# Altium PCB SmartKey_v3.PcbDoc
Units mm, origin at the board's own origin, x right, y up, seen from the top; angles counter-clockwise.
Board outline 79 x 72 mm, 2 copper layers (Top Layer, Bottom Layer); 36 components, 19 nets, 113 pads, 246 vias.
Unrouted connection lines stored in the file: 24.
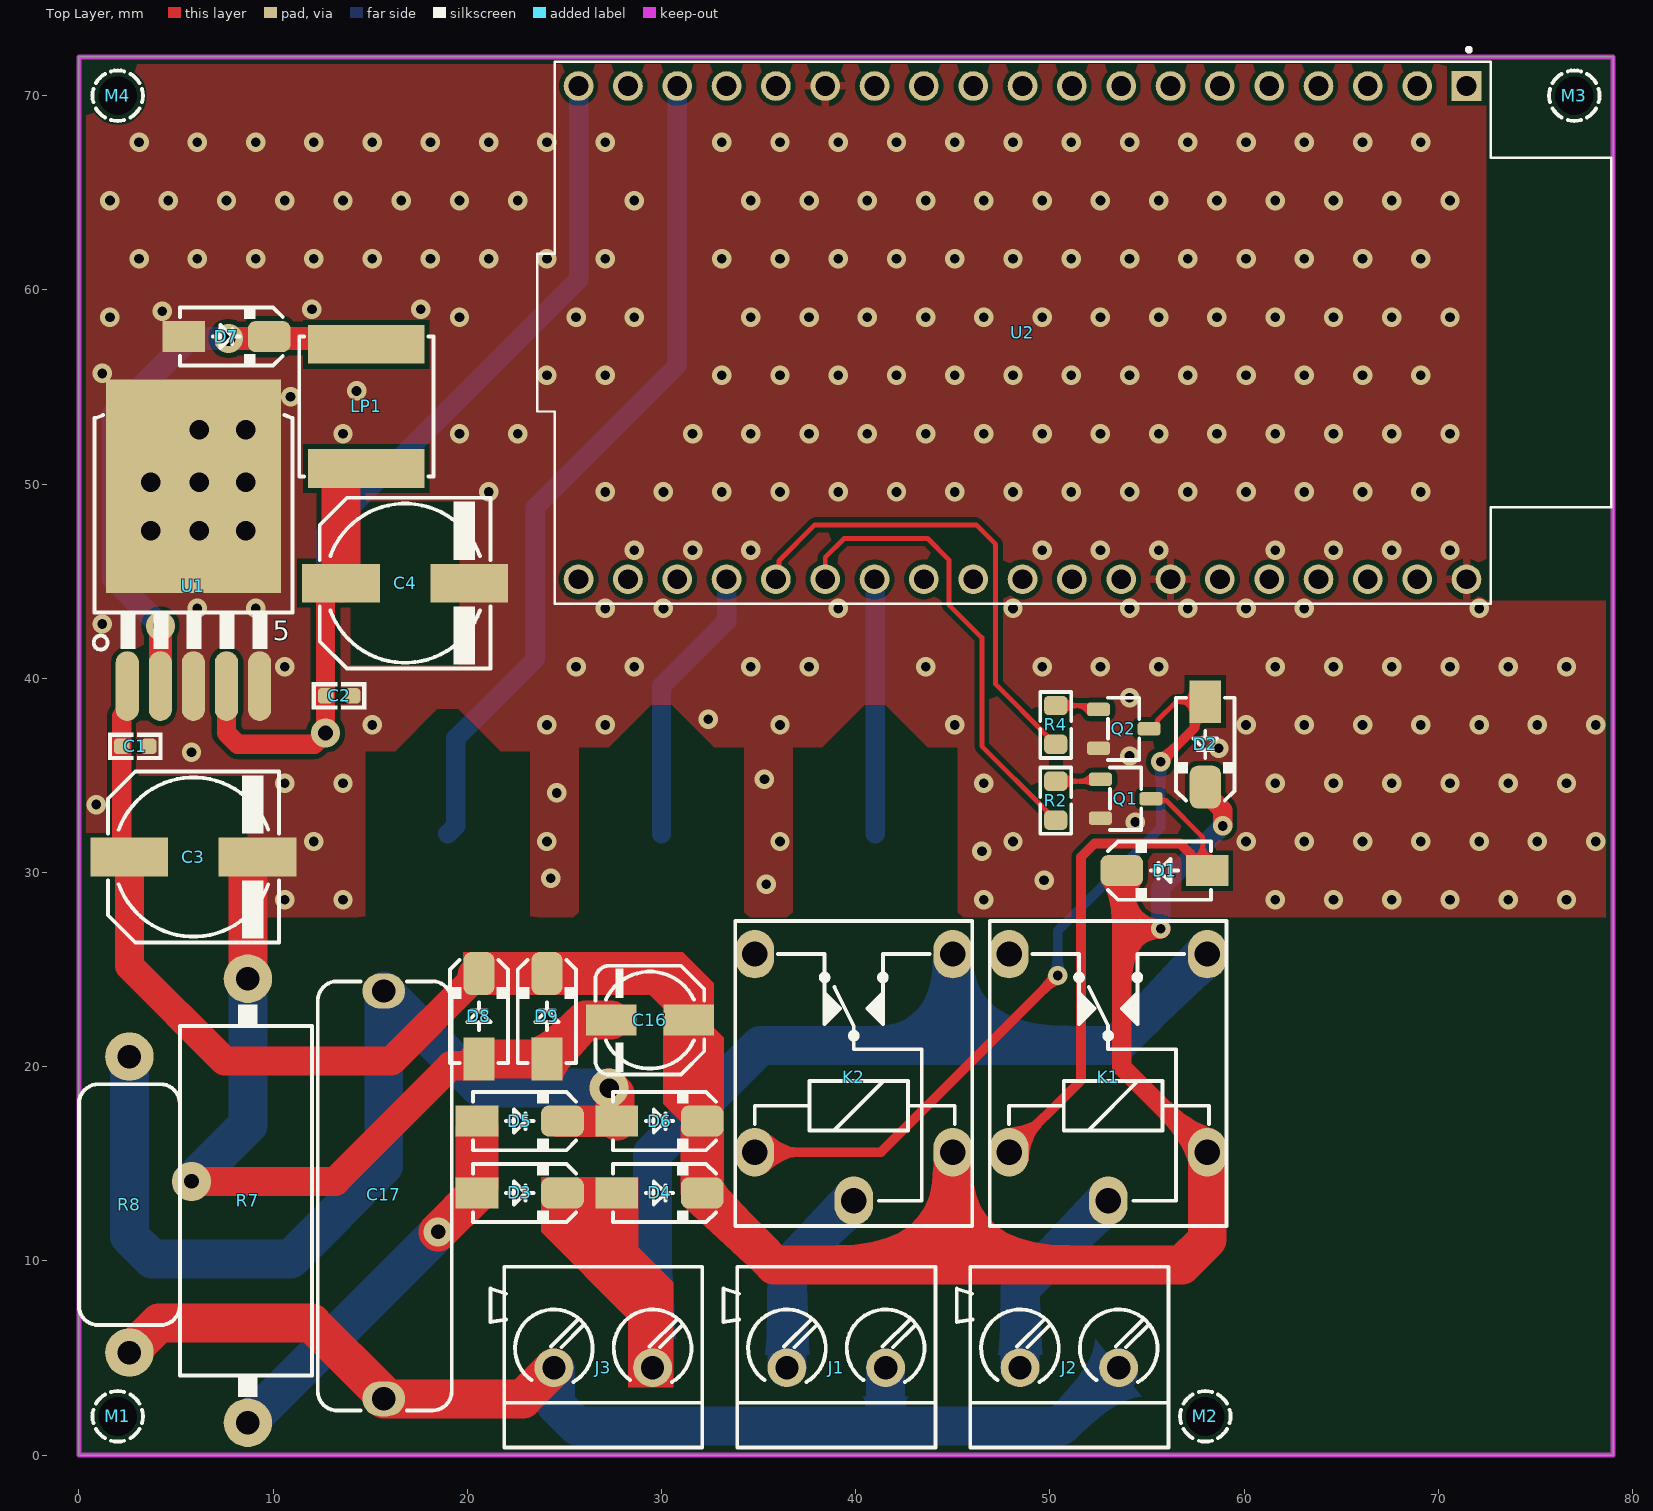
[diagram p0: Top Layer view]
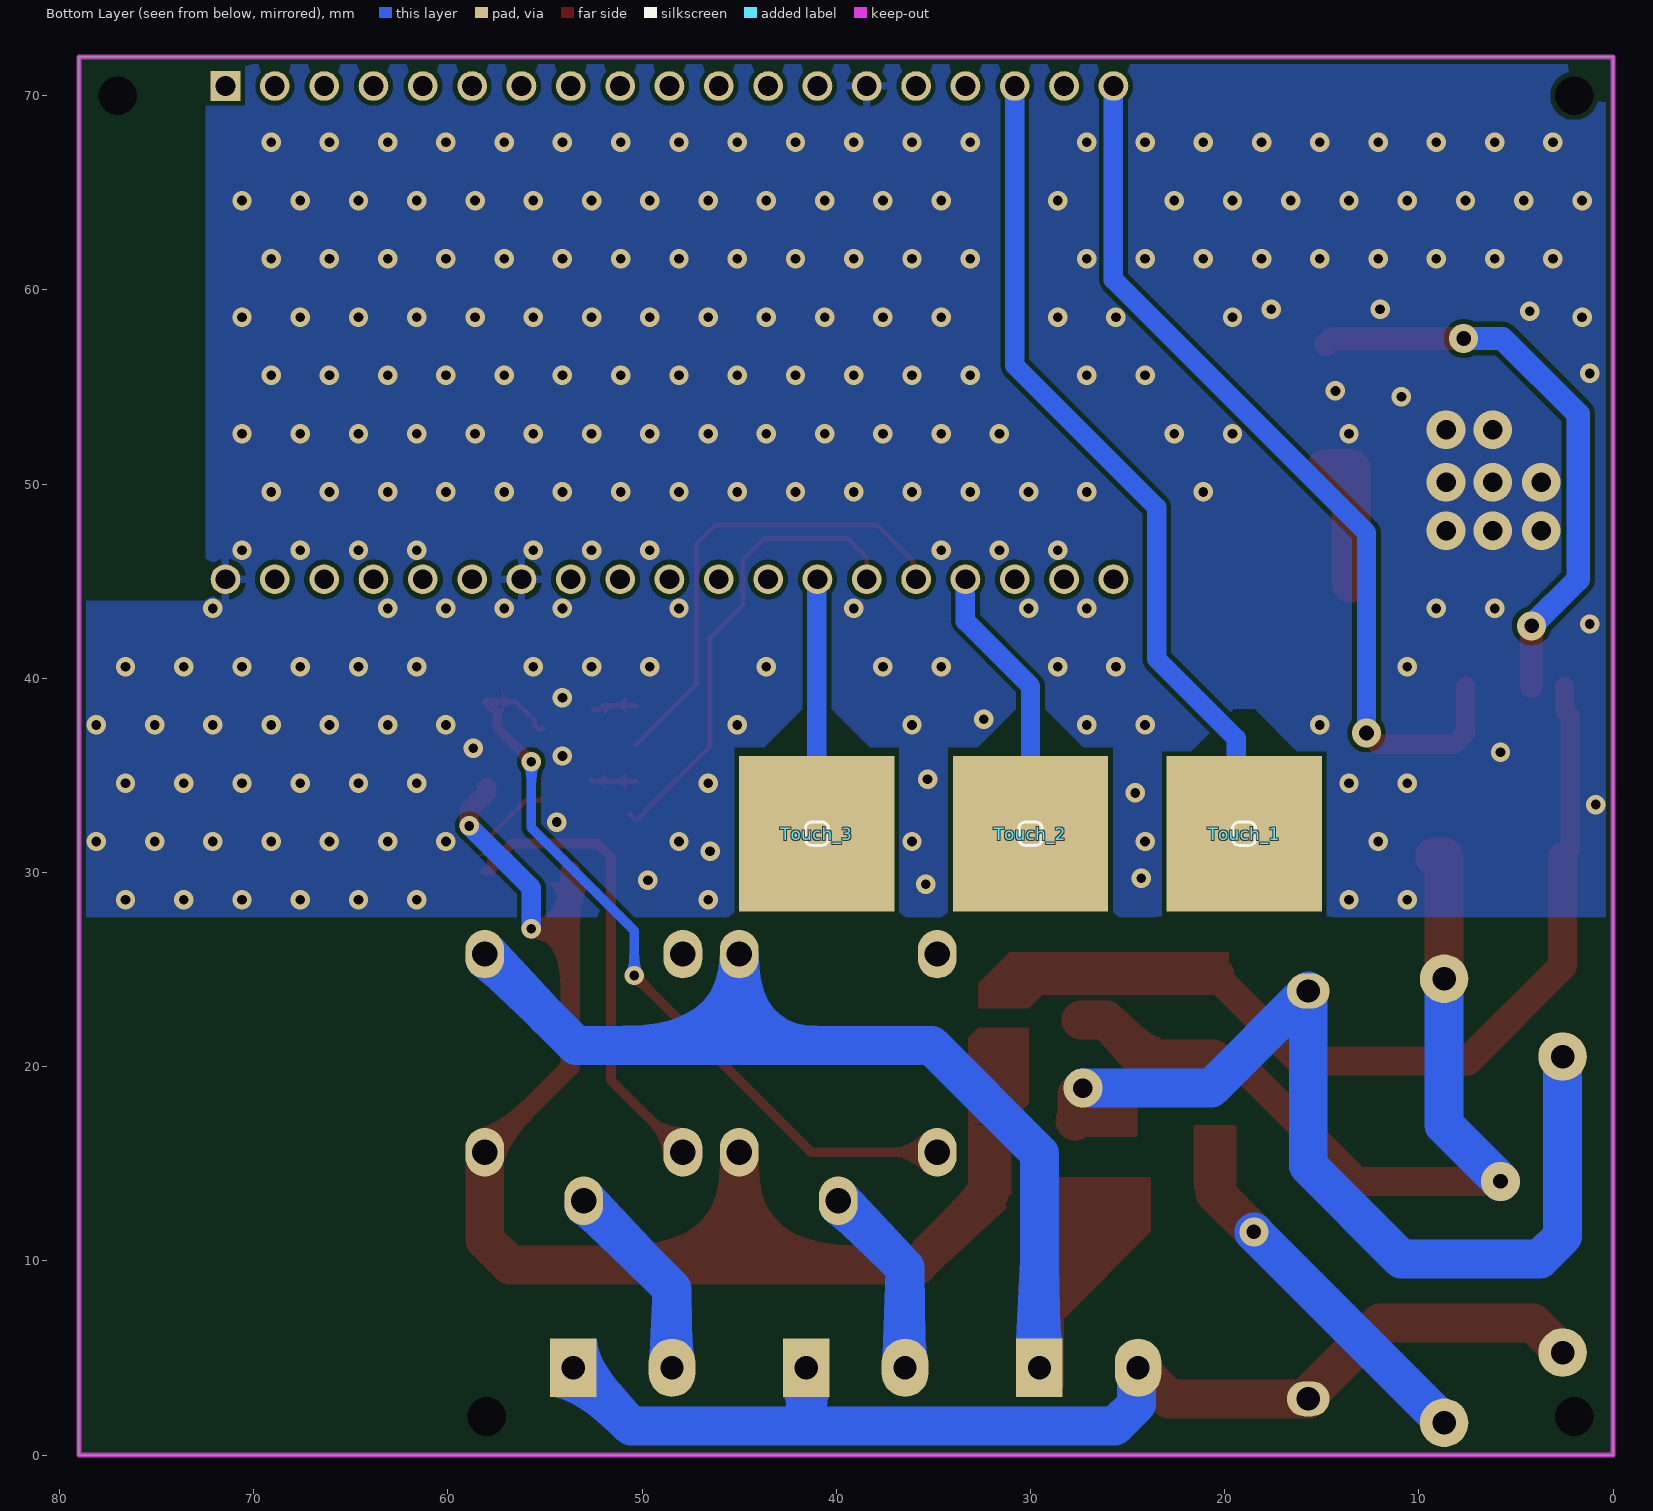
[diagram p1: Bottom Layer view, seen from below]
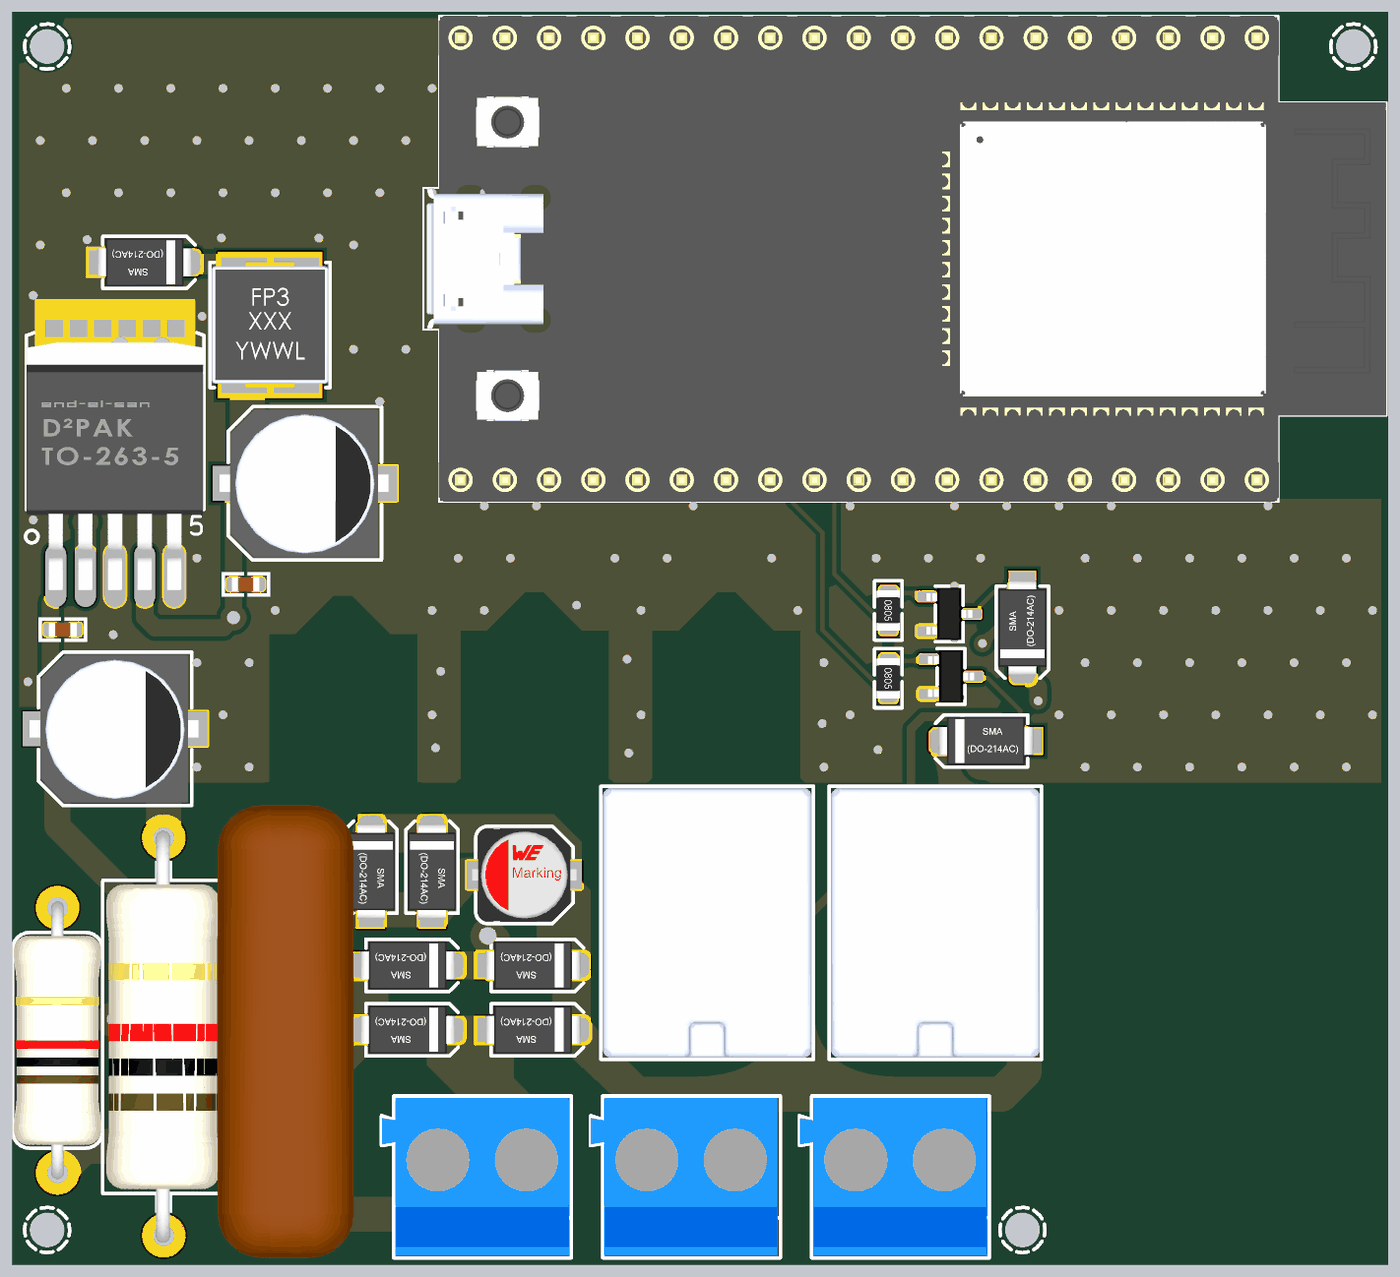
[diagram p2: 3D render of the assembled board from above, using the file's embedded part models]

## Layer stack, top to bottom
Top Solder: solder mask 0.0102, Solder Resist, Dk 3.5
Top Layer: signal copper 0.0356
Dielectric 1: dielectric 0.32, FR-4, Dk 4.8
Bottom Layer: signal copper 0.0356
Bottom Solder: solder mask 0.0102, Solder Resist, Dk 3.5

## Board outline
0,0 79,0 79,72 0,72

## Design rules (kind name [scope] priority, off if disabled: settings)
Clearance [All] p1: gap=0.25 ignorepadtopadclearanceinfootprint=FALSE
DiffPairsRouting [All] p1: maxlimit=0.3 minlimit=0.2 mostfreqgap=0.3 toplayer_minwidth=0.2 toplayer_maxwidth=0.3 toplayer_prefwidth=0.3 bottomlayer_minwidth=0.2 bottomlayer_maxwidth=0.3 bottomlayer_prefwidth=0.3 maxuncoupledlength=12.7
HoleSize [All] p1: absolutevalues=TRUE maxlimit=10 minlimit=0.5 maxpercent=80.000 minpercent=20.000
HoleToHoleClearance [All] p1: gap=0.3 allowstackedmicrovias=TRUE
PlaneClearance [All] p1: clearance=0.3
PlaneConnect [All] p1: pad.planeconnectstyle=Relief pad.reliefexpansion=0.5 pad.reliefentries=4 pad.reliefconductorwidth=0.4 pad.reliefairgap=0.3 via.planeconnectstyle=Direct via.reliefexpansion=0.5 via.reliefentries=4 via.reliefconductorwidth=0.4 via.reliefairgap=0.3
PolygonConnect PolygonConnect_Via [All vs IsVia] p1: connectstyle=Direct reliefconductorwidth=0.254 reliefentries=4 polygonreliefangle="90 Angle" airgapwidth=0.254
PolygonConnect PolygonConnect_Pad [All] p2: thpad.connectstyle=Relief thpad.reliefconductorwidth=0.4 thpad.reliefentries=4 thpad.polygonreliefangle="90 Angle" thpad.airgapwidth=0.3 smdpad.connectstyle=Direct smdpad.reliefconductorwidth=0.4 smdpad.reliefentries=4 smdpad.polygonreliefangle="90 Angle" smdpad.airgapwidth=0.3 via.connectstyle=Relief via.reliefconductorwidth=0.4 via.reliefentries=4 via.polygonreliefangle="90 Angle" via.airgapwidth=0.3
RoutingVias [All] p1: holewidth=0.5 width=1 viastyle="Through Hole" minholewidth=0.5 minwidth=1 maxholewidth=5 maxwidth=10
SolderMaskExpansion [All] p1: expansion=0.102 istentingtop=FALSE
Width [All] p1: maxlimit=10 minlimit=0.25 preferedwidth=0.25
25 further rules are at their usual default settings.

## Components (designator, comment, footprint, x,y, rotation, side; value= is the part's Value field where it differs from the comment)
C1 "100nF" C0603 2.9,36.5 r0 top
C2 "100nF" C0603 13.4,39.1 r0 top
C3 "470uF" C_EL_8 5.9,30.8 r0 top
C4 "470uF" C_EL_8 16.8,44.9 r0 top
C16 "47uF" C_EL_5 29.4,22.4 r180 top
C17 "1uF/400V" C_PLY_22X7 15.7,13.4 r90 top
D1 "1N4007" D_SMA 55.9,30.1 r180 top
D2 "1N4007" D_SMA 58,36.6 r270 top
D3 "1N4007" D_SMA 22.7,13.5 r0 top
D4 "1N4007" D_SMA 29.9,13.5 r0 top
D5 "1N4007" D_SMA 22.7,17.2 r0 top
D6 "1N4007" D_SMA 29.9,17.2 r0 top
D7 "1N5822" D_SMA 7.6,57.6 r0 top
D8 "ZENER24V0" D_SMA 20.6,22.6 r90 top
D9 "ZENER24V0" D_SMA 24.1,22.6 r90 top
J1 "CONN_TB2" TBB_2 39,4.5 r180 top locked
J2 "CONN_TB2" TBB_2 51,4.5 r180 top locked
J3 "CONN_TB2" TBB_2 27,4.5 r180 top locked
K1 "RELAY_SPDT" REL_SPDT_5_1512 53,15.6 r180 top
K2 "RELAY_SPDT" REL_SPDT_5_1512 39.9,15.6 r180 top
LP1 "3.3uH" L_7 14.8,54 r270 top
M1 "DNP/MH" PSPMH2 2,2 r0 top locked
M2 "DNP/MH" PSPMH2 58,2 r0 top locked
M3 "DNP/MH" PSPMH2 77,70 r0 top locked
M4 "DNP/MH" PSPMH2 2,70 r0 top locked
Q1 "C945" SOT23_3 53.9,33.8 r0 top
Q2 "C945" SOT23_3 53.8,37.4 r0 top
R2 "1K" R0805 50.3,33.7 r270 top
R4 "1K" R0805 50.3,37.6 r270 top
R7 "68R" R3W_AX09 8.7,13.1 r270 top
R8 "1M/1W" R1W_AX06 2.6,12.9 r90 top
Touch_1 "TESTPOINT_SMD" TPSMD_S1 19,32 r90 bottom value=VALUE
Touch_2 "TESTPOINT_SMD" TPSMD_S1 30,32 r90 bottom value=VALUE
Touch_3 "TESTPOINT_SMD" TPSMD_S1 41,32 r90 bottom value=VALUE
U1 "LM2596HVS" D2PAK_5 5.9,39.6 r0 top
U2 "ESP32-DEVKITC" MODULE_ESP32-DEVKITC 48.6,57.8 r270 top locked

## Footprints (in the part's own frame and the unit in brackets; to place one, negate y for a bottom-side part, rotate by r counter-clockwise, add the part's x,y. Pads: shape width x height; smd on the part's side, far side on the other; paste and mask are expansions set on the pad)
C0603 [mm] "CHIP Capacitor, 1.6X0.8mm, 0603 OPTIMIZED"
  rrect50% 0.8x0.8 smd mask+0.075: 1(-0.7,0) 2(0.7,0)
  Top Layer pour cut-out: -0.5,0.4 0.5,0.4 0.5,-0.4 -0.5,-0.4
  silkscreen extent -1.4,-0.7 1.4,0.7, body extent -0.8,-0.4 0.8,0.4, height 0.9
C_EL_5 [mm] "Electrolytic Cap, D: 5.0mm, L: 5.8mm, Size C"
  rect 2.6x1.6 smd: 1(-2,0) 2(2,0)
  Top Layer pour cut-out: 1.905,2.667 1.905,-2.7 -1.905,-2.7 -1.905,2.667
  silkscreen extent -2.8,-2.8 2.8,2.8, body extent -3,-2.65 3,2.65
C_EL_8 [mm] "Electrolytic Cap, Size E, Size F, 8.3X10"
  rect 4x2 smd: 1(-3.3,0) 2(3.3,0)
  Top Layer pour cut-out: 2.794,4.191 2.794,-4.191 -2.794,-4.191 -2.794,4.191
  silkscreen extent -4.4,-4.4 4.4,4.4, body extent -4.9,-4.25 4.8,4.25, height 10.3
C_PLY_22X7 [mm] "CAP, POLYESTER, 33.0X7.0mm pitch: 20.0mm, 0.68uF 400V"
  oval 1.8x2.2 hole 1.2: 1(-10.5,0) 2(10.5,0)
  silkscreen extent -11.1,-3.5 11,3.4, body extent -13,-3.9 13,3.9, height 19
D2PAK_5 [mm] "TO-263-5L, D2PAK-5, DDPAK, FMG170_5_S1000"
  oval 1.2x3.6 smd: 1(-3.404,0) 2(-1.702,0) 3(0,0) 4(1.702,0) 5(3.404,0)
  rect 9x11 smd paste-6: 6(0,10.3)
  silkscreen extent -5.14,1.88 5.1,13.96, body extent -5.08,-0.84 5.08,13.39, height 4.87
D_SMA [mm] "SMA Molded Diode, 2-Leads, Body 4.3x2.7mm, SOD-128"
  rect 2.2x1.6 smd paste-0.1: 1(-2.2,0)
  rrect50% 2.2x1.6 smd paste-0.1: 2(2.2,0)
  silkscreen extent -2.4,-1.5 2.9,1.5, body extent -2.75,-1.4 2.75,1.4, height 2.6
L_7 [mm] "INDUCTOR, 7.2X6.9mm, 7.1X6.5mm, SPM6530"
  rect 2x6 smd paste-3: 1(-3.2,0) 2(3.2,0)
  silkscreen extent -3.6,-3.45 3.6,3.45, body extent -3.62,-3.35 3.63,3.35, height 3
MODULE_ESP32-DEVKITC [mm]
  rect 1.53x1.53 hole 1.02: 1(-12.7,22.85)
  round 1.53 hole 1.02: 2(-12.7,20.31) 3(-12.7,17.77) 4(-12.7,15.23) 5(-12.7,12.69) 6(-12.7,10.15) 7(-12.7,7.61) 8(-12.7,5.07) 9(-12.7,2.53) 10(-12.7,-0.01) 11(-12.7,-2.55) 12(-12.7,-5.09) 13(-12.7,-7.63) 14(-12.7,-10.17) 15(-12.7,-12.71) 16(-12.7,-15.25) 17(-12.7,-17.79) 18(-12.7,-20.33) 19(-12.7,-22.87) 20(12.7,-22.87) 21(12.7,-20.33) 22(12.7,-17.79) 23(12.7,-15.25) 24(12.7,-12.71) 25(12.7,-10.17) 26(12.7,-7.63) 27(12.7,-5.09) 28(12.7,-2.55) 29(12.7,-0.01) 30(12.7,2.53) 31(12.7,5.07) 32(12.7,7.61) 33(12.7,10.15) 34(12.7,12.69) 35(12.7,15.23) 36(12.7,17.77) 37(12.7,20.31) 38(12.7,22.85)
  silkscreen extent -14.67,-25 13.95,30.3, body extent -13.97,-24.8 13.97,30.3, height 6.45
PSPMH2 [mm] "Plastic Spacer mouting, Hole 2mm"
  round 0 hole 2 unplated mask+0.1: ""(0,0)
  Top Layer pour cut-out: 0,1.5 -0.574,1.386 -1.061,1.061 -1.386,0.574 -1.5,0 -1.5,0 -1.386,-0.574 -1.061,-1.061 -0.574,-1.386 0,-1.5 0,-1.5 0.75,-1.299 1.299,-0.75 1.5,0 1.5,0 1.386,0.574 1.061,1.061 0.574,1.386 0,1.5
  silkscreen extent -1.3,-1.3 1.3,1.3
R1W_AX06 [mm] "RESISTOR 1 WATT, AXIAL0.6"
  round 2.5 hole 1.2: 1(-7.62,0) 2(7.62,0)
  silkscreen extent -6.2,-2.6 6.2,2.6, body extent -7.97,-2.49 7.97,2.51, height 5
R3W_AX09 [mm] "RESISTOR 3 WATT, AXIAL0.9"
  round 2.5 hole 1.2: 1(-11.43,0) 2(11.43,0)
  silkscreen extent -10.1,-3.5 10.1,3.3, body extent -11.83,-3.3 11.83,3.2, height 6.5
R0805 [mm] "CHIP RESISTOR 1/8 WATT ,2.0X1.3mm, 0805, 2012"
  rrect50% 1x1.2 smd paste-0.1 mask+0.075: 1(-1,0) 2(1,0)
  Top Layer pour cut-out: -0.5,0.8 0.5,0.8 0.5,-0.8 -0.5,-0.8
  silkscreen extent -1.7,-0.8 1.7,0.8, body extent -1.15,-0.67 1.15,0.68, height 0.76
REL_SPDT_5_1512 [mm] "RELAY, SPDT, 15.40x12.10x14.0mm, G8QN, SUN HOLD RAM"
  oval 2x2.5 hole 1.3: 1(0,2.5) 2(5.1,-10.2) 3(-5.1,-10.2) 4(-5.1,0) 5(5.1,0)
  silkscreen extent -6.1,-11.9 6.1,3.8, body extent -6,-11.8 6,3.7, height 14
SOT23_3 [mm] "SOT-23, Micro3, MO-178, TO-236AB, MO-193C, SuperSOT3, SC-59, 1.5x3mm, Pitch 1.9mm"
  rrect50% 1.2x0.7 smd paste-0.05 mask+0.1: 1(-1.3,1) 2(-1.3,-1) 3(1.3,0)
  silkscreen extent -0.8,-1.6 0.8,1.6, body extent -1.32,-1.5 1.32,1.5, height 1.08
TBB_2 [mm] "Terminal Block Blue"
  round 2 / inner round 2 / far side rect 2.4x3 hole 1.2: 1(-2.54,0)
  round 2 / inner round 2 / far side oval 2.4x3 hole 1.2: 2(2.54,0)
  silkscreen extent -5.1,-5.2 5.8,4.1, body extent -4.96,-5.08 5.78,3.99, height 12.52
TPSMD_S1 [mm] "Test Point, SMD Pad, Circle, 1mm X 1mm"
  rect 8x8 smd paste-1.016 mask+0.025: 1(0,0)
  silkscreen extent -0.6,-0.6 0.6,0.6

## Part data
C1 C2: library part CAP_SMD_MLCC_0805, "CAP, MLCC, -F, -V, MATERIAL, -%, 0201", ASSEMBLY=ASSEMBLY, MANF=-, MANF_P#=MANF_PART#, PARAM="-, -%", PARAM2=-V, PRICE="100= 1$"
C3 C4 C16: library part CAP_SMD_EL, "CAP, THD, ELEC,", ASSEMBLY=ASSEMBLY, DESC=DESCRIPTION, DIST#=MOUSER, MANF=MANF, MANF_P#=MANF_PART#, PARAM=20%, PARAM2=-V, PRICE="10= -$"
C17: library part CAP_THD_FILM_POLYESTER, "CAP, FILM,", ASSEMBLY=ASSEMBLY, DESC="CAP, FILM,", MANF=MANF, MANF_P#=MANF_PART#, PARAM2=400V, PRICE="100= 1$"
D1 D2 D3 D4 D5 D6: library part DIODE_SMD_1N4007, "DIODE, GENERAL PURPOSE, 1000V/1A", ASSEMBLY=ASSEMBLY, DESC=DESCRIPTION, MANF=Kingtronics, MANF_P#=M7, PARAM="1000V VRRM", PARAM2=1A, PRICE=PRICE
D7: library part DIODE_SMD_SCHOTTKY_1N5822, "DIODE, SCHOTTKY, 40V, 3A", ASSEMBLY=ASSEMBLY, DESC=DESCRIPTION, MANF=DIODES, MANF_P#=1N5822, PARAM=40V, PARAM2=3A, PRICE=PRICE
D8 D9: library part DIODE_SMD_ZENER_SMAZ5V6, "DIODE, ZENER, 1W, 5.6V", ASSEMBLY=ASSEMBLY, DESC=DESCRIPTION, MANF=Diodes, MANF_P#=SMAZ5V6-13-F, PARAM=5.6V, PARAM2="1W, 2Ohm, -55~150oC", PRICE=0.5$
J1 J2 J3: "CONN, TERMINAL BLOCK, 5.08mm pitch"
K1 K2: library part RELAY_SPST_5_1512_G8QN, "Relay, SPDT, 5P, 15.4X12.1mm, 16V/30A", MANF=OMRON, MANF_P#=G8QN, PARAM="12V, 50mA", PARAM2="16VDC, 30A", PRICE=PRICE
LP1: library part IND_SMD_3.3uH_8A, "INDUCTOR, 3.3uH, 8A (Irms), 10mOhm", ASSEMBLY=ASSEMBLY, DESC="INDUCTOR, 3.3uH, 8A (Irms), 10mOhm", MANF=Bourns, MANF_P#=SRP7050TA-3R3M, PARAM="8A (Irms), 12A Isat", PARAM2=10mOhm, PRICE=1.3$
M1 M2 M3 M4: library part PSPMH2, "Plastic Spacer mouting, Hole 2mm", ASSEMBLY=DNP
Q1 Q2: library part NPN_C945_SMD, "BJT, NPN, 50v, 0.15A, THD, TO92, BC945", MANF=-, MANF_P#="C945, 2SC945, BC945", PARAM="50v, 0.15A", PARAM2=200mW
R2 R4: library part RES_SMD_0603, "RESISTOR, SMD", ASSEMBLY=ASSEMBLY, DESC=DESCRIPTION, DIST#=MOUSER, MANF=-, MANF_P#=-, PARAM=-W, PARAM2=1%, PRICE="100= 0.5$"
R7 R8: library part RES_THD, "RESISTOR, THD", ASSEMBLY=ASSEMBLY, DESC=DESCRIPTION, DIST#=MOUSER, MANF="KOA SPEER", MANF_P#=RK73H1ETTP4701F, PARAM=0.063W, PARAM2=1%, PRICE="100= 0.5$"
Touch_1 Touch_2 Touch_3: "TEST POINT", MANF=MANF, MANF_P#=MANF_P#
U2: Package=None, Availability=Unavailable, MF="{'manufacturer': u'Espressif Systems'}", MP=ESP32-DEVKITC, PRICE=None

## Via types
v1: diameter 1, hole 0.5, Top Layer to Bottom Layer, tented both sides, 232 vias
v2: diameter 2, hole 1, Top Layer to Bottom Layer, tented both sides, 9 vias
v3: diameter 1.5, hole 0.75, Top Layer to Bottom Layer, tented both sides, 4 vias
v4: diameter 2, hole 0.75, Top Layer to Bottom Layer, tented both sides, 1 vias

## Nets (pads, with @x,y where several pads share a name; then routed paths per layer and width w, separated by ;. In a path a pad name is that pad's centre, name@x,y a point inside that pad or via, vN(x,y) a via of type N, cw(c..) or ccw(c..) an arc to the next point about the centre after c; other vN are vias at no path point)
+5V0: C2.1 C4.1 LP1.2 U1.4 U2.19 | length 62.1
  Top Layer w1: U1.4 7.602,37.186 8.188,36.6 12.114,36.6 v3(12.7,37.186) C2.1 12.7,44.4 13.2,44.9 C4.1
  Top Layer w2: C4.1 13.5,50.8 LP1.2
  Bottom Layer w1: v3(12.7,37.186) 12.7,47.5 25.73,60.53 U2.19
+24V0: C1.1 C3.1 C16.1 D1.2 D2.2 D4.2 D6.2 D8.2 D9.2 K1.4 K2.4 U1.1 | length 102.6
  Top Layer w1: U1.1 2.496,38.346 2.2,38.049 2.2,31.2 C3.1 ; D1.2 53.7,27.1 ; v1(55.7,27.1) 53.7,27.1 ; D2.2 58,34.1 58.3,33.8 58.314,33.8 58.9,33.214 v1(58.9,32.4) ; K1.4 53.7,20 53.7,27.1
  Top Layer w1.5: C3.1 2.6,25.2 7.5,20.3 16.1,20.3 20.25,24.45 20.55,24.45 20.6,24.5 D8.2
  Top Layer w2: D8.2@20.5,24.7 D8.2 ; D4.2 35.8,9.8 45,9.8 ; K2.4 45,9.8 ; K1.4 58.1,11.1 56.8,9.8 45,9.8
  Bottom Layer w1: v1(55.7,27.1) 55.7,29.2 v1(58.9,32.4)
GND: C1.2 C2.2 C3.2 C4.2 C16.2 D7.1 D8.1 D9.1 Q1.2 Q2.2 R7.1 U1.3 U1.5 U1.6 U2.14 U2.32 U2.38 | length 43.6
  Top Layer w1.5: v4(5.8,14.1) 13.2,14.1 19.15,20.05 20.55,20.05 20.6,20.1 D8.1
  Top Layer w2: R7.1 8.7,30.8 C3.2 ; D8.1 D9.1 26.1,22.4 C16.2
  Bottom Layer w2: v4(5.8,14.1) 8.7,17 R7.1
  other v1: 10.6,28.6 13.6,28.6 46.6,28.6 61.6,28.6 64.6,28.6 67.6,28.6 70.6,28.6 73.6,28.6 76.6,28.6 35.4,29.4 49.7,29.6 24.3,29.7 46.5,31.1 12.1,31.6 24.1,31.6 36.1,31.6 48.1,31.6 60.1,31.6 63.1,31.6 66.1,31.6 69.1,31.6 72.1,31.6 75.1,31.6 78.1,31.6 54.4,32.6 0.9,33.5 24.6,34.1 10.6,34.6 13.6,34.6 46.6,34.6 61.6,34.6 64.6,34.6 67.6,34.6 70.6,34.6 73.6,34.6 76.6,34.6 35.3,34.8 54.1,36 5.8,36.2 58.7,36.4 15.1,37.6 24.1,37.6 27.1,37.6 36.1,37.6 45.1,37.6 60.1,37.6 63.1,37.6 66.1,37.6 69.1,37.6 72.1,37.6 75.1,37.6 78.1,37.6 32.4,37.9 54.1,39 10.6,40.6 25.6,40.6 28.6,40.6 34.6,40.6 37.6,40.6 43.6,40.6 49.6,40.6 52.6,40.6 55.6,40.6 61.6,40.6 64.6,40.6 67.6,40.6 70.6,40.6 73.6,40.6 76.6,40.6 1.2,42.8 6.1,43.6 9.1,43.6 27.1,43.6 30.1,43.6 39.1,43.6 48.1,43.6 54.1,43.6 57.1,43.6 60.1,43.6 63.1,43.6 72.1,43.6 28.6,46.6 31.6,46.6 34.6,46.6 49.6,46.6 52.6,46.6 55.6,46.6 61.6,46.6 64.6,46.6 67.6,46.6 70.6,46.6 21.1,49.6 27.1,49.6 30.1,49.6 33.1,49.6 36.1,49.6 39.1,49.6 42.1,49.6 45.1,49.6 48.1,49.6 51.1,49.6 54.1,49.6 57.1,49.6 60.1,49.6 63.1,49.6 66.1,49.6 69.1,49.6 13.6,52.6 19.6,52.6 22.6,52.6 31.6,52.6 34.6,52.6 37.6,52.6 40.6,52.6 43.6,52.6 46.6,52.6 49.6,52.6 52.6,52.6 55.6,52.6 58.6,52.6 61.6,52.6 64.6,52.6 67.6,52.6 70.6,52.6 10.9,54.5 14.3,54.8 24.1,55.6 27.1,55.6 33.1,55.6 36.1,55.6 39.1,55.6 42.1,55.6 45.1,55.6 48.1,55.6 51.1,55.6 54.1,55.6 57.1,55.6 60.1,55.6 63.1,55.6 66.1,55.6 69.1,55.6 1.2,55.7 1.6,58.6 19.6,58.6 25.6,58.6 28.6,58.6 34.6,58.6 37.6,58.6 40.6,58.6 43.6,58.6 46.6,58.6 49.6,58.6 52.6,58.6 55.6,58.6 58.6,58.6 61.6,58.6 64.6,58.6 67.6,58.6 70.6,58.6 4.3,58.9 12,59 17.6,59 3.1,61.6 6.1,61.6 9.1,61.6 12.1,61.6 15.1,61.6 18.1,61.6 21.1,61.6 24.1,61.6 27.1,61.6 33.1,61.6 36.1,61.6 39.1,61.6 42.1,61.6 45.1,61.6 48.1,61.6 51.1,61.6 54.1,61.6 57.1,61.6 60.1,61.6 63.1,61.6 66.1,61.6 69.1,61.6 1.6,64.6 4.6,64.6 7.6,64.6 10.6,64.6 13.6,64.6 16.6,64.6 19.6,64.6 22.6,64.6 28.6,64.6 34.6,64.6 37.6,64.6 40.6,64.6 43.6,64.6 46.6,64.6 49.6,64.6 52.6,64.6 55.6,64.6 58.6,64.6 61.6,64.6 64.6,64.6 67.6,64.6 70.6,64.6 3.1,67.6 6.1,67.6 9.1,67.6 12.1,67.6 15.1,67.6 18.1,67.6 21.1,67.6 24.1,67.6 27.1,67.6 33.1,67.6 36.1,67.6 39.1,67.6 42.1,67.6 45.1,67.6 48.1,67.6 51.1,67.6 54.1,67.6 57.1,67.6 60.1,67.6 63.1,67.6 66.1,67.6 69.1,67.6
  other v2: 3.7,47.6 6.2,47.6 8.6,47.6 3.7,50.1 6.2,50.1 8.6,50.1 6.2,52.8 8.6,52.8
NetC17_2: C17.2 D5.2 D6.1 R8.2 | length 49.4
  Top Layer w2: v2(27.3,18.9) 27.6,18.6 27.6,17.3 D6.1
  Bottom Layer w2: R8.2 2.6,11.272 3.772,10.1 10.9,10.1 15.7,14.9 C17.2 20.7,18.9 v2(27.3,18.9)
NetD1_1: D1.1 K1.5 Q1.3 | length 29.3
  Top Layer w0.25: Q1.3 55.289,33.711 55.989,33.711 57.871,31.829 D1.1@57.871,30.329
  Top Layer w0.5: K1.5 51.6,19.3 51.6,30.8 52.3,31.5 56.7,31.5 57.25,30.95 57.25,30.65 57.8,30.1 D1.1
NetD2_1: D2.1 K2.5 Q2.3 | length 40.2
  Top Layer w0.25: Q2.3 55.318,37.4 55.539,37.621 55.539,37.839 56.5,38.8 D2.1
  Top Layer w0.5: K2.5 41.3,15.6 v1(50.4,24.7) ; v1(55.7,35.7) 57.45,37.45 57.45,38.25 D2.1
  Bottom Layer w0.5: v1(50.4,24.7) 50.4,27 55.7,32.3 v1(55.7,35.7)
NetD3_1: D3.1 D5.1 R7.2 | length 16.7
  Top Layer w2: v3(18.5,11.5) D3.1
  Bottom Layer w2: R7.2 18.5,11.47 v3(18.5,11.5)
NetD7_2: D7.2 LP1.1 U1.2 | length 29.7
  Top Layer w1.2: U1.2 4.198,42.698 v3(4.2,42.7) ; v3(7.7,57.5) 14.5,57.5 LP1.1
  Bottom Layer w1.2: v3(4.2,42.7) 1.8,45.1 1.8,53.6 5.7,57.5 v3(7.7,57.5)
NetJ1_2: J1.2 K2.1 | length 10.2
  Bottom Layer w2: J1.2 36.46,9.66 39.65,12.85 39.9,12.85 K2.1
NetJ2_2: J2.2 K1.1 | length 10.6
  Bottom Layer w2: J2.2 48.46,8.56 52.75,12.85 53,12.85 K1.1
NetQ1_1: Q1.1 R2.1 | length 2.3
  Top Layer w0.25: R2.1 52.5,34.7 Q1.1
NetQ2_1: Q2.1 R4.1 | length 2.3
  Top Layer w0.25: R4.1 52.023,38.6 52.223,38.4 Q2.1
Null: C17.1 J1.1 J2.1 J3.2 R8.1 | length 60.7
  Top Layer w2: R8.1 4.12,6.8 12,6.8 15.6,3.2 15.6,3 C17.1 22.86,2.9 J3.2
  Bottom Layer w2: J3.2 24.537,4.423 24.537,2.624 25.66,1.5 41.5,1.5 ; J1.1 41.54,1.54 41.5,1.5 ; J2.1 53.54,4.2 53.34,4 53.06,4 50.56,1.5 41.5,1.5
Phase: D3.2 D4.1 J3.1 K1.3 K2.3 | length 48.7
  Bottom Layer w2: J3.1 29.54,15.54 35.1,21.1 41,21.1 45,21.1 ; K2.3 45,21.1 ; K1.3 58.1,25.55 57.85,25.55 53.4,21.1 45,21.1
Relay_1: R2.2 U2.25 | length 24.5
  Top Layer w0.25: U2.25 38.43,46.23 39.4,47.2 43.7,47.2 44.8,46.1 44.8,43.8 46.5,42.1 46.5,36.5 49.825,33.175 49.825,33.143 50.268,32.7 R2.2 R2.2@50.598,32.998
Relay_2: R4.2 U2.24 | length 25
  Top Layer w0.25: U2.24 36.051,45.261 36.051,46.051 37.9,47.9 46.2,47.9 47.2,46.9 47.2,39.7 49.825,37.075 49.825,37.043 50.268,36.6 R4.2 R4.2@50.332,36.6
Touch_S1: Touch_1.1 U2.17 | length 43.4
  Bottom Layer w1: Touch_1.1 19.414,32.414 19.414,36.914 23.5,41 23.5,48.8 30.81,56.11 U2.17
Touch_S2: Touch_2.1 U2.23 | length 14.5
  Bottom Layer w1: Touch_2.1 30,39.6 33.35,42.95 U2.23
Touch_S3: Touch_3.1 U2.26 | length 13.1
  Bottom Layer w1: U2.26 41,45.07 Touch_3.1
pads on no net: K1.2 K2.2 M1. M2. M3. M4. U2.1 U2.2 U2.3 U2.4 U2.5 U2.6 U2.7 U2.8 U2.9 U2.10 U2.11 U2.12 U2.13 U2.15 U2.16 U2.18 U2.20 U2.21 U2.22 U2.27 U2.28 U2.29 U2.30 U2.31 U2.33 U2.34 U2.35 U2.36 U2.37

## Polygon pours and split planes (outlines as drawn)
GND on Bottom Layer "GND_L02_P000" (solid, pour order 0): 0,71.7 0.2,71.9 79,71.9 79,27.7 78.9,27.6 78.8,27.7 0,27.7
GND on Top Layer "GND_L01_P001" (solid, pour order 1): 0,71.7 0.2,71.9 79,71.9 79,27.7 78.9,27.6 78.8,27.7 0,27.7

## Keep-outs
Keep-Out Layer:
  the board outline again, w0.254

## Other copper
Top Layer:
  pour cut-out: 72.465,71.515 72.465,44.035 72.5,44 79,44 79,71.9 78.9,72 72.4,72
  pour cut-out: 36.75,36.45 36.75,27.95 45.25,27.95 45.25,36.45 43.711,36.45 41.526,38.635 40.465,38.635 38.28,36.45
  pour cut-out: 25.75,36.45 25.75,27.95 34.25,27.95 34.25,36.45 32.711,36.45 30.526,38.635 29.465,38.635 27.28,36.45
  pour cut-out: 14.75,36.25 14.75,27.75 23.25,27.75 23.25,36.25 21.711,36.25 19.526,38.435 18.465,38.435 16.28,36.25
  region net Phase: 23.8,14.3 23.8,11.5 28.3,7 28.3,3.5 30.6,3.5 30.6,8.9 28.8,10.7 28.8,14.3
  region net +24V0: 30.1,23 29.4,23.7 19.8,23.7 19.8,25.9 31.1,25.9 32.7,24.3 32.7,23
  region net +24V0: 31,17.2 30.1,18.1 30.1,22 32.7,22 33.2,21.5 33.2,17
  region net +24V0: 31,13.4 31,17 33.2,17 33.2,13.3
  region net NetC17_2: 27.5,18 24.5,18 24.5,16.4 27.5,16.4
  region net NetD3_1: 19.4,13.5 19.4,16.9 19.5,17 21.6,17 21.6,13.7 21.5,13.6
Bottom Layer:
  pour cut-out: 72.465,71.515 72.465,44.035 72.5,44 79,44 79,71.9 78.9,72 72.4,72
  pour cut-out: 36.75,36.45 36.75,27.95 45.25,27.95 45.25,36.45 43.711,36.45 41.526,38.635 40.465,38.635 38.28,36.45
  pour cut-out: 25.75,36.45 25.75,27.95 34.25,27.95 34.25,36.45 32.711,36.45 30.526,38.635 29.465,38.635 27.28,36.45
  pour cut-out: 14.75,36.25 14.75,27.75 23.25,27.75 23.25,36.25 21.711,36.25 19.526,38.435 18.465,38.435 16.28,36.25

## Text inside footprints (layer, text, board x,y; h text height)
U1: Top Overlay "5" at 9.989,41.967 h1.02